# Altium PCB PCB1.PcbDoc
Units mm, origin at the board's own origin, x right, y up, seen from the top; angles counter-clockwise.
Board outline 40 x 30 mm, 4 copper layers (Top Layer, Internal Plane 1, Internal Plane 2, Bottom Layer), stack 1.537 mm thick; 84 components, 59 nets, 351 pads, 111 vias.
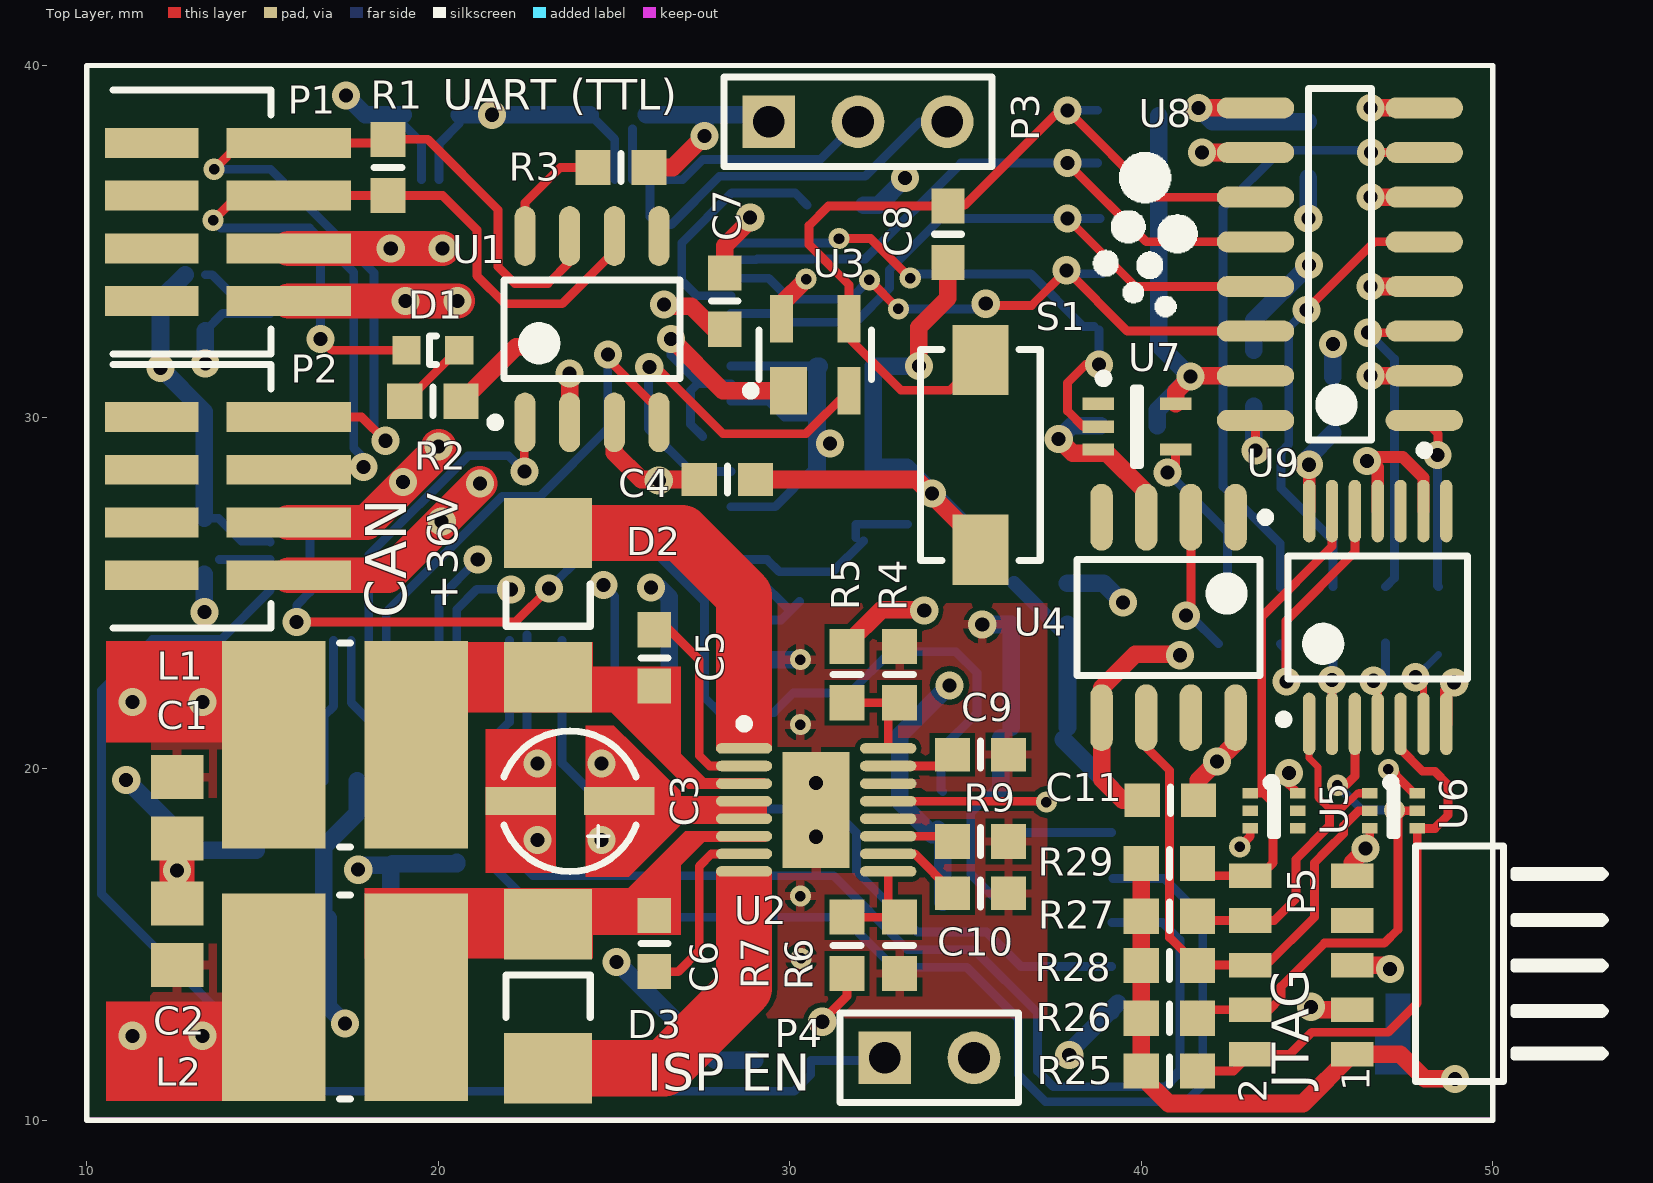
[diagram p0: Top Layer view]
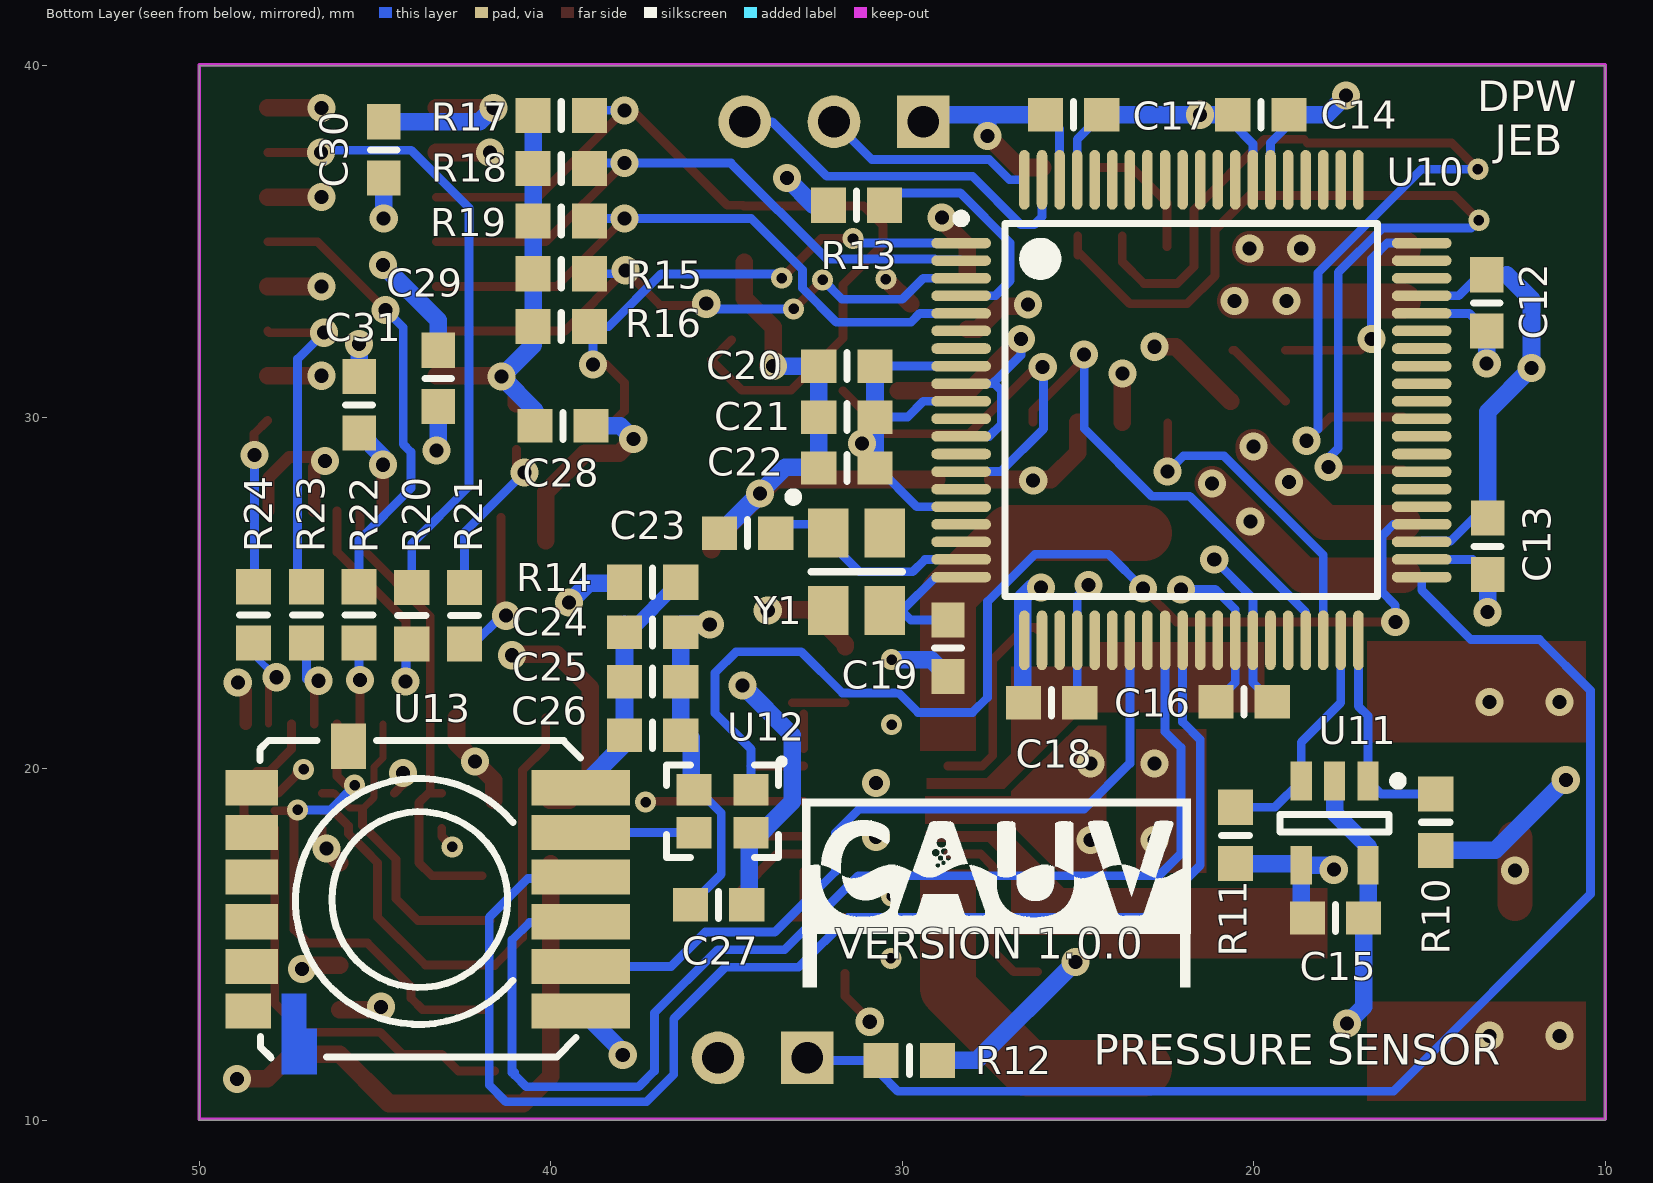
[diagram p1: Bottom Layer view, seen from below]
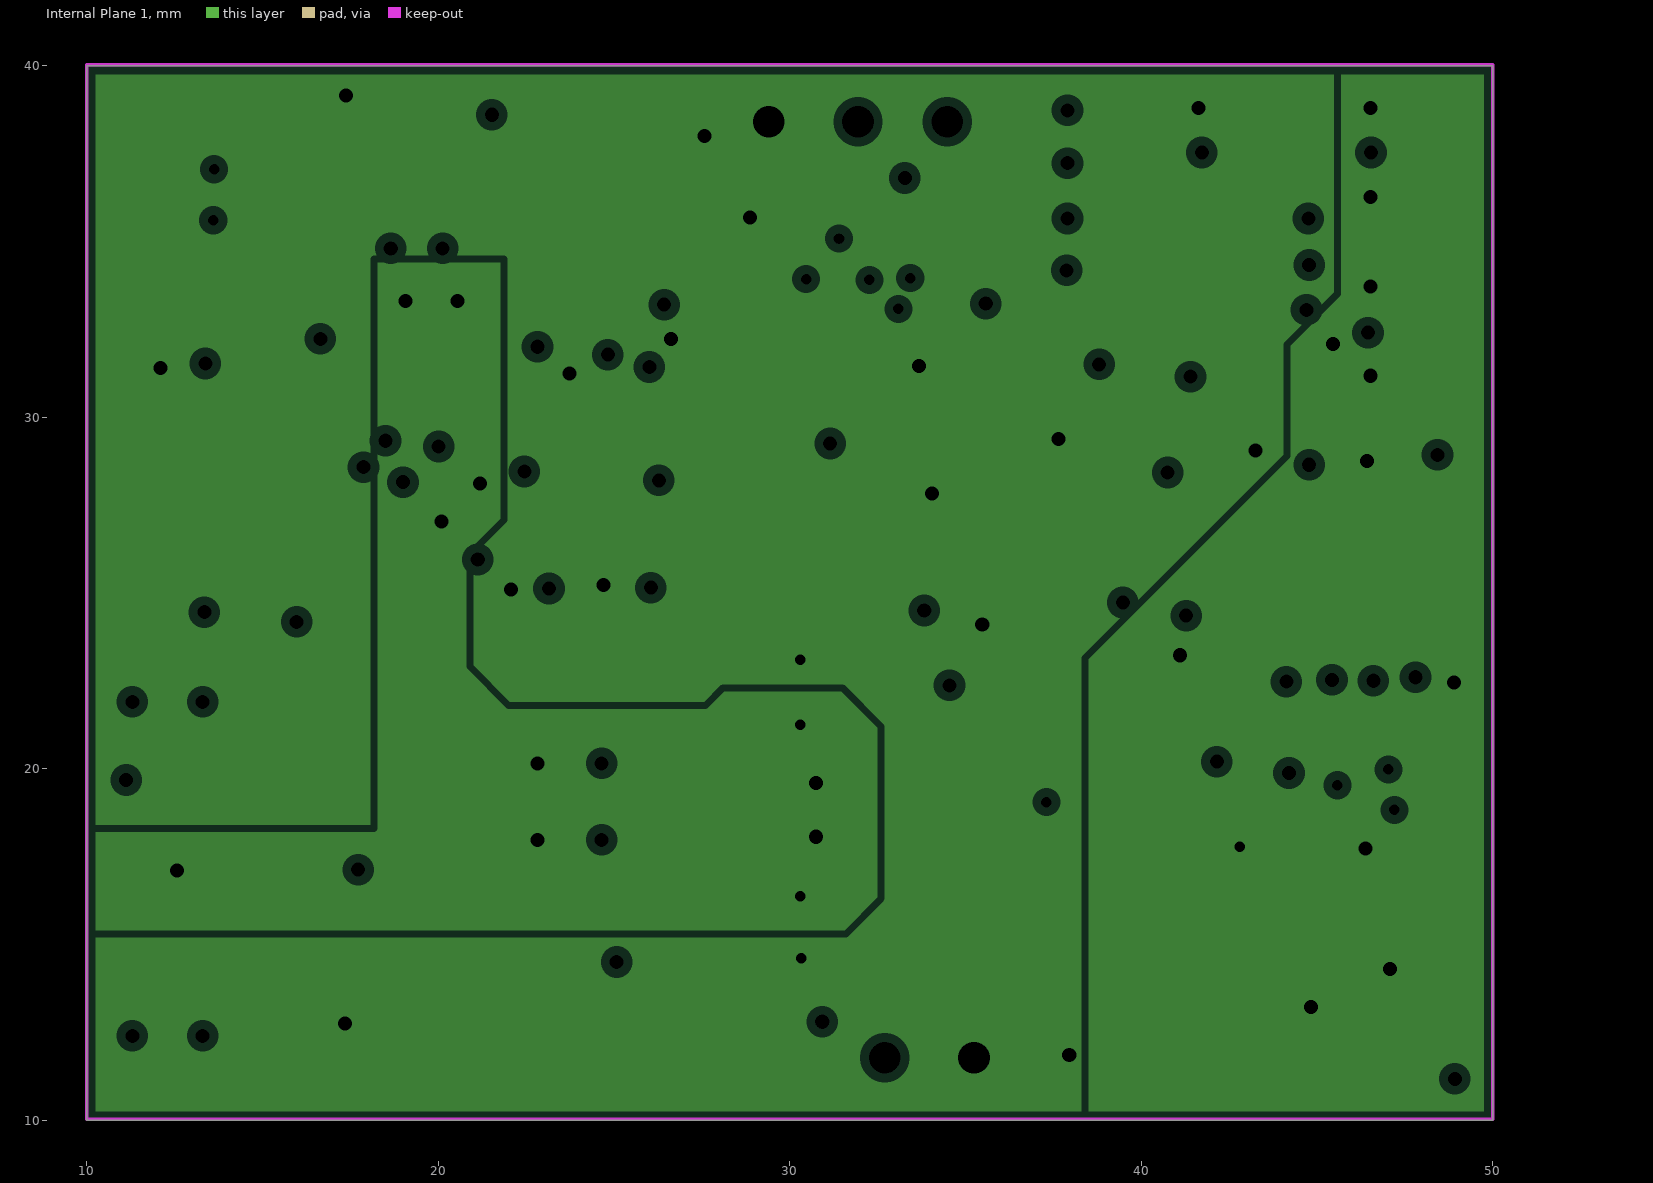
[diagram p2: Internal Plane 1, clearances drawn from the general rule]
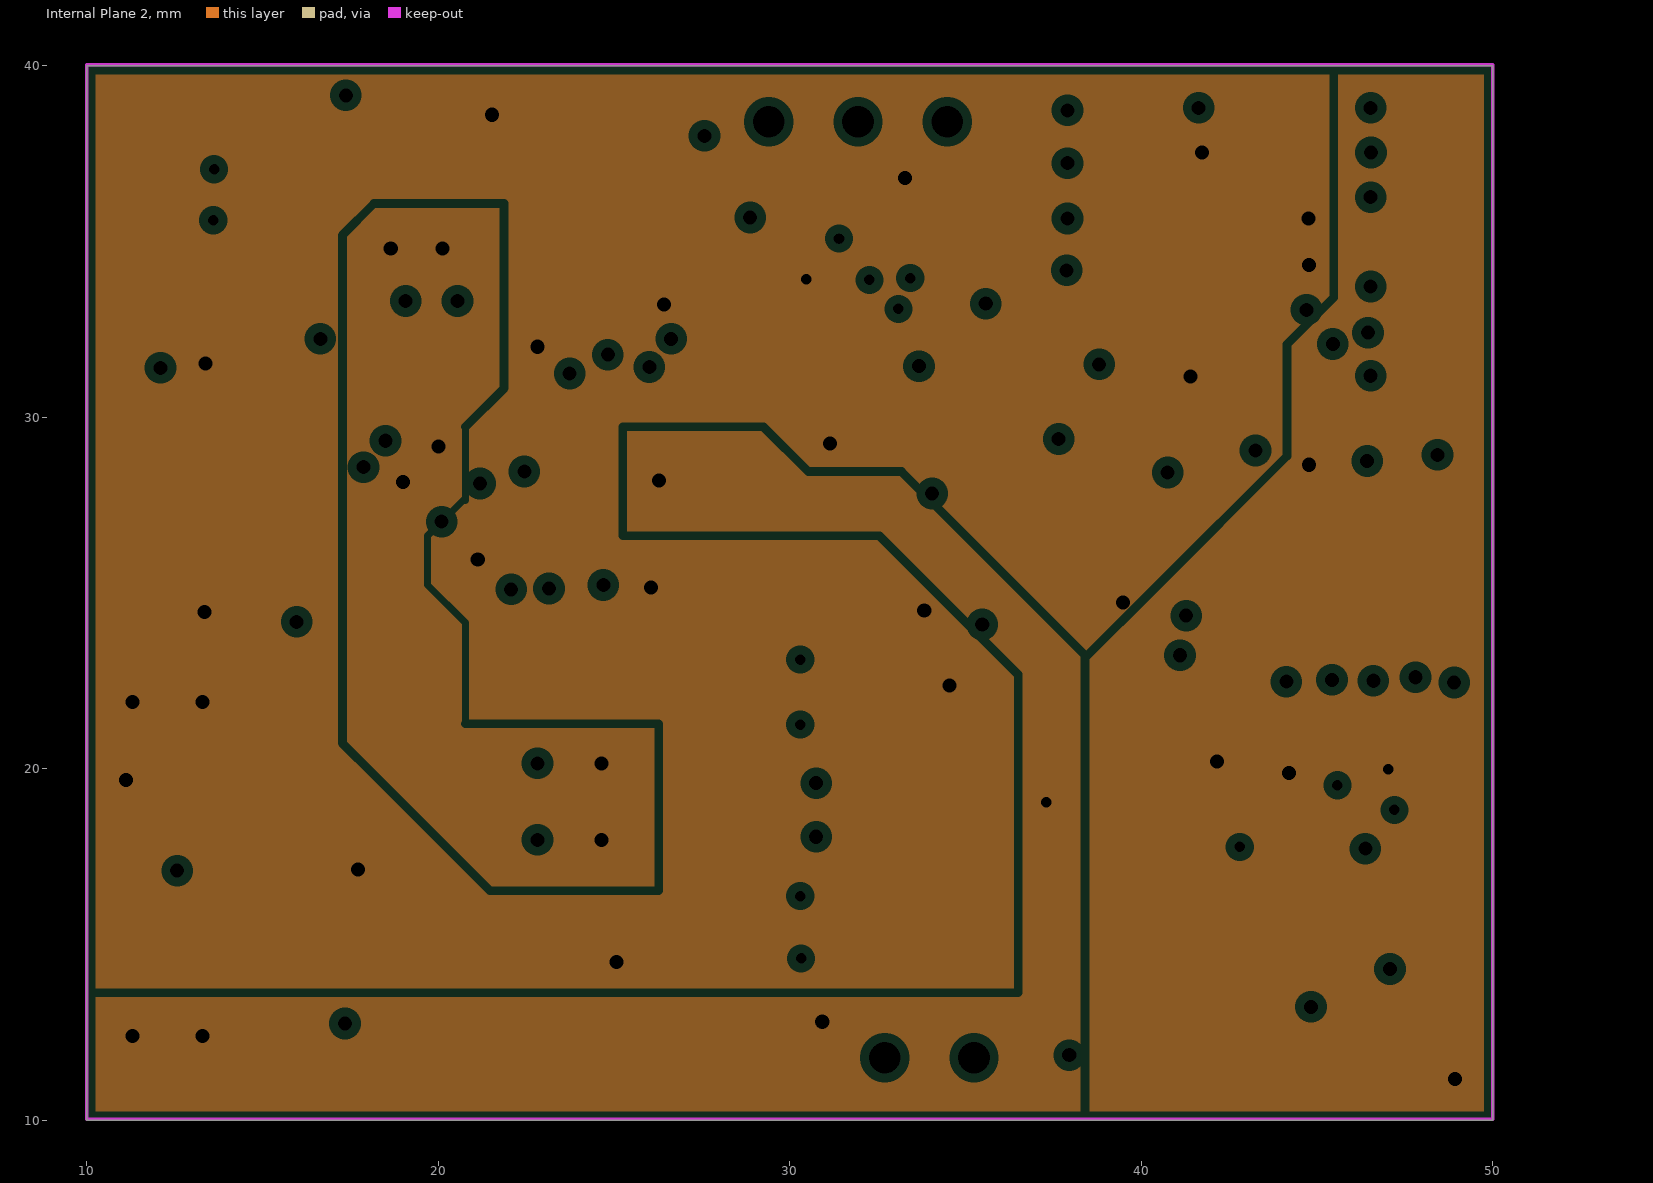
[diagram p3: Internal Plane 2, clearances drawn from the general rule]

## Layer stack, top to bottom
Top Layer: signal copper 0.018
Dielectric: core 0.22, FR-4, Dk 4.2
Internal Plane 1: plane copper 0.035, net (Multiple Nets)
Dielectric: prepreg 0.9906, FR-4, Dk 4.55
Internal Plane 2: plane copper 0.035, net (Multiple Nets)
Dielectric: core 0.22, FR-4, Dk 4.2
Bottom Layer: signal copper 0.018

## Board outline
10,10 10,40 50,40 50,10

## Design rules (kind name [scope] priority, off if disabled: settings)
Clearance [All] p1: gap=0.15
ComponentClearance [All] p1: gap=0.25 collisioncheckmode=3 verticalgap=0.25 showdistances=FALSE
HoleSize [All] p1: absolutevalues=TRUE maxlimit=10 minlimit=0.2 maxpercent=80.000 minpercent=20.000
HoleToHoleClearance [All] p1: gap=0.25 allowstackedmicrovias=TRUE
MinimumAnnularRing [All] p1: minimumring=0.15
MinimumSolderMaskSliver [All] p1: minsoldermaskwidth=0.125
PlaneClearance [All] p1: clearance=0.25
PlaneConnect [All] p1: planeconnectstyle=Relief reliefexpansion=0.5 reliefentries=4 reliefconductorwidth=0.25 reliefairgap=0.25
PolygonConnect [All] p1: connectstyle=Relief reliefconductorwidth=0.25 reliefentries=4 polygonreliefangle="90 Angle"
RoutingVias [All] p1: holewidth=0.3 width=0.6 viastyle="Through Hole" minholewidth=0.3 minwidth=0.6 maxholewidth=0.4 maxwidth=0.8
SilkToSilkClearance [All] p1: silktosilkclearance=0.25
SilkscreenOverComponentPads [All] p1: minsilkscreentomaskgap=0.125
SolderMaskExpansion [All] p1: expansion=0.125
Width "CAN Power" [InNet('CAN_POWER')] p1: maxlimit=10 minlimit=0.2 preferedwidth=2
Width Power [InNetClass('Power')] p2: maxlimit=10 minlimit=0.25 preferedwidth=0.5
Width General [All] p3: maxlimit=10 minlimit=0.2 preferedwidth=0.25
20 further rules are at their usual default settings.

## Classes and differential pairs
component class "U_CAN Termination Connector": P1 P2 R1
component class mcu: P3 U10
component class "U_I2C 3": R10 R11
component class "U_Dual 5V+3": C1 C2 C3 C5 C6 C9 C10 D2 D3 L1 L2 R4 R5 R6 R7 R9 U2
component class "U_1KB I2C EEPROM": C15 U11
component class "U_ARM JTAG Header - Optoisolated": C11 C28 C29 C30 C31 P5 R15 R16 R17 R18 R19 R20 R21 R22 R23 R24 R25 R26 R27 R28 R29 U4 U5 U6 U7 U8 U9
component class U_jtag: C12 C13 C14 C16 C17 C18 C19 C20 C21 C22 C23 P4 R12 R13 S1 Y1
component class U_led: D1 R2
component class U_pressure: C24 C25 C26 C27 C32 R14 U12 U13 U14
component class "U_Reset Supervisor": C7 C8 C33 C34 U3
component class "U_CAN Transciever": C4 R3 U1
net class Power: +3.3 +3.3_ISOL +5 CAN_POWER GND GND_ISOL

## Components (designator, comment, footprint, x,y, rotation, side; value= is the part's Value field where it differs from the comment)
C1 "Cap" C0805 12.575,18.875 r270 top (schematic designator C4)
C2 "Cap" C0805 12.575,15.3 r90 top (schematic designator C5)
C3 "Cap Pol1" EEEHC1H2R2R 22.35,19.075 r270 top (schematic designator C1)
C4 "Cap" C0603 28.225,28.225 r0 top (schematic designator C1)
C5 "Cap" C0603 26.15,23.15 r90 top (schematic designator C2)
C6 "Cap" C0603 26.15,15.025 r270 top (schematic designator C3)
C7 "Cap" C0603 28.15,33.3 r90 top (schematic designator C1)
C8 "Cap" C0603 34.5,35.2 r270 top (schematic designator C2)
C9 "Cap" C0603 35.425,20.4 r0 top (schematic designator C6)
C10 "Cap" C0603 35.425,16.45 r0 top (schematic designator C7)
C11 "Cap" C0603 40.825,19.1 r180 top (schematic designator C1)
C12 "Cap" C0603 13.375,33.25 r90 bottom (schematic designator C3)
C13 "Cap" C0603 13.35,26.325 r90 bottom (schematic designator C1)
C14 "Cap" C0603 19.8,38.6 r180 bottom (schematic designator C6)
C15 "Cap" C0603 17.675,15.75 r180 bottom (schematic designator C1)
C16 "Cap" C0603 20.275,21.9 r0 bottom (schematic designator C4)
C17 "Cap" C0603 25.125,38.6 r0 bottom (schematic designator C5)
C18 "Cap" C0603 25.75,21.875 r180 bottom (schematic designator C8)
C19 "Cap" C0603 28.7,23.425 r270 bottom (schematic designator C10)
C20 "Cap" C0603 31.575,31.45 r0 bottom (schematic designator C7)
C21 "Cap" C0603 31.575,30 r0 bottom (schematic designator C9)
C22 "Cap" C0603 31.575,28.55 r0 bottom (schematic designator C2)
C23 "Cap" C0603 34.4,26.7 r0 bottom (schematic designator C11)
C24 "Cap" C0603 37.1,23.875 r0 bottom (schematic designator C15)
C25 "Cap" C0603 37.1,22.475 r0 bottom (schematic designator C14)
C26 "Cap" C0603 37.1,20.95 r0 bottom (schematic designator C13)
C27 "Cap" C0603 35.225,16.125 r180 bottom (schematic designator C12)
C28 "Cap" C0603 39.65,29.75 r0 bottom (schematic designator C4)
C29 "Cap" C0603 43.2,31.1 r90 bottom (schematic designator C3)
C30 "Cap" C0603 44.75,37.6 r270 bottom (schematic designator C2)
C31 "Cap" C0603 45.45,30.35 r270 bottom (schematic designator C5)
D1 "" LGQ971 20.6,31.9 r180 top
D2 "D Schottky" VS-10BQ030TRPBF 23.125,24.65 r270 top (schematic designator D1)
D3 "D Schottky" VS-10BQ030TRPBF 23.125,13.525 r90 top (schematic designator D2)
L1 "Inductor" SDR0604-150YL 17.35,20.675 r0 top
L2 "Inductor" SDR0604-150YL 17.35,13.5 r180 top
P1 "Header 4" 87437-0443 15.75,33.3 r180 top (schematic designator P2)
P2 "Header 4" 87437-0443 15.75,25.5 r180 top (schematic designator P1)
P3 "Header 3" HDR1X3 29.4,38.4 r0 top (schematic designator P2)
P4 "Header 2" HDR1X2 32.7,11.775 r0 top (schematic designator P1)
P5 "Header 5X2H" FTSH-105-01-L-DH 53.4,17.6 r180 top (schematic designator P1)
R1 "Res2" R0603 18.575,37.1 r270 top
R2 "Res" R0603 19.85,30.45 r0 top (schematic designator R6)
R3 "Res" R0603 25.2,37.1 r180 top (schematic designator R1)
R4 "Res" R0603 33.125,22.675 r270 top (schematic designator R3)
R5 "Res" R0603 31.625,22.675 r90 top (schematic designator R1)
R6 "Res" R0603 33.125,14.975 r90 top (schematic designator R4)
R7 "Res" R0603 31.625,14.975 r270 top (schematic designator R2)
R9 "Res" R0603 35.425,17.925 r180 top (schematic designator R5)
R10 "Res" R0603 14.825,18.475 r270 bottom (schematic designator R2)
R11 "Res" R0603 20.525,18.1 r270 bottom (schematic designator R1)
R12 "Res" R0603 29.8,11.7 r180 bottom (schematic designator R1)
R13 "Res" R0603 31.3,36.025 r0 bottom (schematic designator R2)
R14 "Res" R0603 37.1,25.3 r0 bottom (schematic designator R3)
R15 "Res" R0603 39.7,34.075 r0 bottom (schematic designator R2)
R16 "Res" R0603 39.7,32.575 r0 bottom (schematic designator R5)
R17 "Res" R0603 39.7,38.575 r0 bottom (schematic designator R6)
R18 "Res" R0603 39.7,37.075 r180 bottom (schematic designator R4)
R19 "Res" R0603 39.7,35.575 r0 bottom (schematic designator R3)
R20 "Res" R0603 43.95,24.35 r270 bottom (schematic designator R10)
R21 "Res" R0603 42.45,24.35 r270 bottom (schematic designator R9)
R22 "Res" R0603 45.45,24.375 r270 bottom (schematic designator R8)
R23 "Res" R0603 46.95,24.375 r270 bottom (schematic designator R7)
R24 "Res" R0603 48.45,24.375 r270 bottom (schematic designator R1)
R25 "Res" R0603 40.8,11.4 r180 top (schematic designator R11)
R26 "Res" R0603 40.8,12.9 r180 top (schematic designator R12)
R27 "Res" R0603 40.8,15.8 r0 top (schematic designator R13)
R28 "Res" R0603 40.8,14.4 r180 top (schematic designator R14)
R29 "Res" R0603 40.8,17.3 r180 top (schematic designator R15)
S1 "SW-PB" DTSM-32S-B 35.425,28.925 r90 top
U1 "MCP2551" MCP2551 24.375,32.5 r90 top
U2 "LT3509" LT3509 30.75,18.825 r0 top (schematic designator U1)
U3 "STM811" STM811 30.725,31.775 r90 top (schematic designator U1)
U4 "HCPL-0601-500E" HCPL-0601-500 40.775,24.3 r270 top
U5 "TPD4E001DRLR" TPD4E001DRLR 43.1,19.3 r0 top (schematic designator U6)
U6 "TPD4E001DRLR" TPD4E001DRLR 46.5,19.3 r0 top (schematic designator U5)
U7 "SN74LVC1G14" SN74LVC1G14 39.875,29.725 r0 top (schematic designator U3)
U8 "ACSL-6400-00TE" ACSL-6400-00TE 45.65,34.35 r180 top (schematic designator U1)
U9 "74AC04MTC" 74AC04MTC 46.725,24.3 r90 top (schematic designator U2)
U10 "LPC1758" LPC1758FBD80 21.775,30.2 r180 bottom (schematic designator U1)
U11 "24AA08T-I/OT" 24AA08T-I/OT 17.7,18.45 r270 bottom (schematic designator U1)
U12 "LF SPXO009686" "LF SPXO009686" 34.3,19.4 r0 bottom (schematic designator U2)
U13 "MS5535" MS5535 48.5,14.375 r180 bottom (schematic designator U3)
Y1 "XTAL" C3E-24.000-12-3030-X 32.1,26.7 r270 bottom

## Footprints (in the part's own frame and the unit in brackets; to place one, negate y for a bottom-side part, rotate by r counter-clockwise, add the part's x,y. Pads: shape width x height; smd on the part's side, far side on the other; paste and mask are expansions set on the pad)
24AA08T-I/OT [mm] "MICROCHIP - 24AA08T-I/OT - EEPROM SERIAL 8KB, SMD, SOT-23-5"
  rect 1.1x0.6 smd mask+0.175: 1(-1.2,0.95) 2(-1.2,0) 3(-1.2,-0.95)
  rect 1.1x0.6 smd: 4(1.2,-0.95) 5(1.2,0.95)
  silkscreen extent -1.32,-1.55 0.25,1.92, body extent -0.87,-1.55 0.87,1.55, height 1.45
74AC04MTC [mm] "FAIRCHILD SEMICONDUCTOR - 74AC04MTC - IC, SM, LOGIC, 74AC, HEX INVERTER"
  oval 1.78x0.35 smd mask+0.15: 1(-3.027,1.95) 2(-3.027,1.3) 3(-3.027,0.65) 4(-3.027,0) 5(-3.027,-0.65) 6(-3.027,-1.3) 7(-3.027,-1.95) 8(3.027,-1.95) 9(3.027,-1.3) 10(3.027,-0.65) 11(3.027,0) 12(3.027,0.65) 13(3.027,1.3) 14(3.027,1.95)
  silkscreen extent -3.02,-2.55 1.75,2.8, body extent -2.25,-2.55 2.25,2.55, height 1.2
87437-0443 [mm] "MOLEX - 87437-0443 - HEADER, PICO-SPOX, 4WAY"
  rect 3.55x0.85 smd: 1(0,0) 2(0,-1.5) 3(0,-3) 4(0,-4.5)
  rect 2.65x0.85 smd: ""(3.9,-1.5) ""(3.9,0) ""(3.9,-4.5) ""(3.9,-3)
  silkscreen extent 0.5,-6 5,1.5, body extent -0.95,-5.9 5.05,1.4, height 5.77
ACSL-6400-00TE [mm] "AVAGO TECHNOLOGIES - ACSL-6400-00TE - OPTOCOUPLER, SMD, QUAD, HIGH SPEED"
  oval 2.2x0.6 smd: 1(-2.4,4.445) 2(-2.4,3.175) 3(-2.4,1.905) 4(-2.4,0.635) 5(-2.4,-0.635) 6(-2.4,-1.905) 7(-2.4,-3.175) 8(-2.4,-4.445) 9(2.4,-4.445) 10(2.4,-3.175) 11(2.4,-1.905) 12(2.4,-0.635) 13(2.4,0.635) 14(2.4,1.905) 15(2.4,3.175) 16(2.4,4.445)
  silkscreen extent -2.53,-5 0.9,5.42, body extent -1.99,-5 1.99,5, height 1.37
C3E-24.000-12-3030-X [mm]
  rect 1.4x1.15 smd: 1(0,0) 2(2.2,1.6) 3(2.2,0) 4(0,1.6)
  silkscreen extent -1.15,-1.13 1.1,2.1, body extent -0.6,-0.5 2.8,2.1, height 0.75
C0603 [mm] "Chip Capacitor, 2-Leads, Body 1.6x0.8mm, IPC Medium Density"
  rect 1x0.95 smd: 1(-0.8,0) 2(0.8,0)
  silkscreen extent 0,-0.38 0,0.38, body extent -0.88,-0.48 0.87,0.48, height 0.8
C0805 [mm] "KEMET - C0805C104K5RACTU - CAPACITOR, 0805, 100NF, 50V, X7R"
  rect 1.25x1.5 smd: 1(-0.889,0) 2(0.861,0)
  body extent -1.12,-0.72 1.09,0.72, height 1
DTSM-32S-B [mm] "MULTICOMP - DTSM-32S-B - TACTILE SWITCH, SPNO, SMD, 50MA"
  rect 2x1.6 smd: 1(-2.7,0) 2(2.7,0)
  silkscreen extent -3,-1.7 3,1.7, body extent -3.67,-1.75 3.67,1.75, height 2.08
EEEHC1H2R2R [mm] "PANASONIC - EEEHC1H2R2R - CAPACITOR, ELECTROLYTIC, 50V, 2.2UF"
  rect 0.8x2 smd: 1(0,2.8) 2(0,0)
  silkscreen extent -2,-0.48 2,3.28, body extent -2.15,-0.9 2.15,3.7, height 5.9
FTSH-105-01-L-DH [mm] "HEADER, 1.27MM, R/A, SMD, 10WAY"
  rect 1.2x0.7 smd: 1(7.4,5.725) 2(10.3,5.725) 3(7.4,4.456) 4(10.3,4.456) 5(7.4,3.187) 6(10.3,3.187) 7(7.4,1.919) 8(10.3,1.919) 9(7.4,0.65) 10(10.3,0.65)
  silkscreen extent 0.2,-0.2 5.6,6.5, body extent 0,0 10.77,6.35, height 3.43
HCPL-0601-500 [mm] "AVAGO TECHNOLOGIES - HCPL-0601-500E - OPTOCOUPLER, SMD, 10MBD"
  oval 1.9x0.64 smd: 1(-2.85,1.905) 2(-2.85,0.635) 3(-2.85,-0.635) 4(-2.85,-1.905) 5(2.85,-1.905) 6(2.85,-0.635) 7(2.85,0.635) 8(2.85,1.905)
  silkscreen extent -2.97,-2.6 1.65,2.88, body extent -2.03,-2.6 2.03,2.61, height 3.3
HDR1X2 [mm] "Connector; Header; 2 Position"
  rect 1.5x1.5 hole 0.9: 1(0,0)
  round 1.5 hole 0.9: 2(2.54,0)
  silkscreen extent -1.27,-1.27 3.81,1.27
HDR1X3 [mm] "Connector; Header; 3 Position"
  rect 1.5x1.5 hole 0.9: 1(0,0)
  round 1.5 hole 0.9: 2(2.54,0) 3(5.08,0)
  silkscreen extent -1.27,-1.27 6.35,1.27
"LF SPXO009686" [mm]
  rect 1x0.9 smd mask+0.165: 1(0,0) 2(1.625,0) 3(1.625,1.225) 4(0,1.225)
  silkscreen extent -0.94,-0.87 2.4,1.92, body extent -0.45,-0.4 2.07,1.63, height 0.95
LGQ971 [mm] "OSRAM - LGQ971 - LED, SMD, GREEN"
  rect 0.8x0.8 smd: 1(0,0) 2(1.5,0)
  silkscreen extent 0.65,-0.4 0.85,0.4, body extent 0.02,-0.4 1.42,0.4, height 0.9
LPC1758FBD80 [mm] "LPC1758FBD80"
  oval 1.7x0.3 smd: 1(-6.55,4.75) 2(-6.55,4.25) 3(-6.55,3.75) 4(-6.55,3.25) 5(-6.55,2.75) 6(-6.55,2.25) 7(-6.55,1.75) 8(-6.55,1.25) 9(-6.55,0.75) 10(-6.55,0.25) 11(-6.55,-0.25) 12(-6.55,-0.75) 13(-6.55,-1.25) 14(-6.55,-1.75) 15(-6.55,-2.25) 16(-6.55,-2.75) 17(-6.55,-3.25) 18(-6.55,-3.75) 19(-6.55,-4.25) 20(-6.55,-4.75) 41(6.55,-4.75) 42(6.55,-4.25) 43(6.55,-3.75) 44(6.55,-3.25) 45(6.55,-2.75) 46(6.55,-2.25) 47(6.55,-1.75) 48(6.55,-1.25) 49(6.55,-0.75) 50(6.55,-0.25) 51(6.55,0.25) 52(6.55,0.75) 53(6.55,1.25) 54(6.55,1.75) 55(6.55,2.25) 56(6.55,2.75) 57(6.55,3.25) 58(6.55,3.75) 59(6.55,4.25) 60(6.55,4.75)
  oval 0.3x1.7 smd: 21(-4.75,-6.55) 22(-4.25,-6.55) 23(-3.75,-6.55) 24(-3.25,-6.55) 25(-2.75,-6.55) 26(-2.25,-6.55) 27(-1.75,-6.55) 28(-1.25,-6.55) 29(-0.75,-6.55) 30(-0.25,-6.55) 31(0.25,-6.55) 32(0.75,-6.55) 33(1.25,-6.55) 34(1.75,-6.55) 35(2.25,-6.55) 36(2.75,-6.55) 37(3.25,-6.55) 38(3.75,-6.55) 39(4.25,-6.55) 40(4.75,-6.55) 61(4.75,6.55) 62(4.25,6.55) 63(3.75,6.55) 64(3.25,6.55) 65(2.75,6.55) 66(2.25,6.55) 67(1.75,6.55) 68(1.25,6.55) 69(0.75,6.55) 70(0.25,6.55) 71(-0.25,6.55) 72(-0.75,6.55) 73(-1.25,6.55) 74(-1.75,6.55) 75(-2.25,6.55) 76(-2.75,6.55) 77(-3.25,6.55) 78(-3.75,6.55) 79(-4.25,6.55) 80(-4.75,6.55)
  silkscreen extent -6.68,-5.3 5.3,5.57, body extent -6,-6 6,6, height 1.6
LT3509 [mm] "LT3509"
  oval 1.6x0.3 smd: 1(-2.05,1.75) 2(-2.05,1.25) 3(-2.05,0.75) 4(-2.05,0.25) 5(-2.05,-0.25) 6(-2.05,-0.75) 7(-2.05,-1.25) 8(-2.05,-1.75) 9(2.05,-1.75) 10(2.05,-1.25) 11(2.05,-0.75) 12(2.05,-0.25) 13(2.05,0.25) 14(2.05,0.75) 15(2.05,1.25) 16(2.05,1.75)
  rect 1.9x3.3 smd: 17(0,0)
  silkscreen extent -2.17,2.33 -1.92,2.57, body extent -1.55,-2.07 1.55,2.07, height 1.1
MCP2551 [mm]
  oval 1.7x0.6 smd: 1(-2.65,1.905) 2(-2.65,0.635) 3(-2.65,-0.635) 4(-2.65,-1.905) 5(2.65,-1.905) 6(2.65,-0.635) 7(2.65,0.635) 8(2.65,1.905)
  silkscreen extent -2.77,-2.5 1.4,2.88, body extent -1.99,-2.5 1.99,2.5, height 1.75
MS5535 [mm] "Pressure Sensor"
  rect 2.8x1 smd mask+0.135: 1(9.35,-1.27) 2(9.35,0) 3(9.35,1.27) 4(9.35,2.54) 5(9.35,3.81) 6(9.35,5.08)
  rect 1.3x1 smd mask+0.135: ""(-0.1,-1.27)
  rect 1.5x1 smd mask+0.135: ""(0,0) ""(0,1.27) ""(0,2.54) ""(0,3.81) ""(0,5.08)
  rect 1x1.3 smd mask+0.135: ""(2.75,6.26)
  Top Layer region: 1.85,-3.075 1.85,-1.775 1.55,-1.775 1.55,-0.775 0.85,-0.775 0.85,-3.075
  silkscreen extent 0.23,-2.6 9.35,6.43, body extent 0.25,-2.58 9.25,6.42, height 4.48
R0603 [mm]
  rect 1x1 smd: 1(-0.8,0) 2(0.8,0)
  silkscreen extent 0,-0.4 0,0.4, body extent -0.85,-0.48 0.85,0.47, height 0.45
SDR0604-150YL [mm] "BOURNS - SDR0604-150YL - INDUCTOR, SMD, 15UH, 1.6A"
  rect 2.95x5.9 smd: 1(-2.025,0) 2(2.025,0)
  silkscreen extent -0.15,-2.9 0.15,2.9, body extent -2.9,-2.88 2.9,2.92, height 4.8
SN74LVC1G14 [mm] "TEXAS INSTRUMENTS - SN74LVC1G14DCKR - INVERTER, SINGLE, SCHMITT-TRIG, 5SC70"
  rect 0.9x0.35 smd mask+0.15: 1(-1.1,0.65) 2(-1.1,0) 3(-1.1,-0.65)
  rect 0.9x0.35 smd: 4(1.1,-0.65) 5(1.1,0.65)
  silkscreen extent -1.07,-1.1 0.1,1.5, body extent -0.7,-1.07 0.7,1.08, height 1.1
STM811 [mm] "SOT143, 4-Leads, Body 3.0x2.6mm (max), Pitch 1.92mm, IPC Medium Density"
  rect 1.35x1.05 smd: 1(-1.025,0.76)
  rect 1.35x0.65 smd: 2(-1.025,-0.96) 3(1.025,-0.96) 4(1.025,0.96)
  silkscreen extent -1.15,-1.6 0.7,1.96, body extent -0.7,-1.52 0.7,1.52, height 1.12
TPD4E001DRLR [mm] "TEXAS INSTRUMENTS - TPD4E001DRLR - DIODE, TVS"
  rect 0.45x0.3 smd: 1(0,0) 2(0,-0.5) 3(0,-1) 4(1.35,-1) 5(1.35,-0.5) 6(1.35,0)
  silkscreen extent 0.48,-1.2 0.77,0.42, body extent 0.1,-1.2 1.25,0.23, height 0.6
VS-10BQ030TRPBF [mm] "VISHAY FORMERLY I.R. - VS-10BQ030TRPBF - DIODE, SCHOTTKY, 1A, 30V"
  rect 2x2.5 smd: 1(-2.05,0) 2(2.05,0)
  silkscreen extent -0.6,-1.2 0.6,1.2, body extent -2.2,-1.8 2.2,1.8, height 2.4

## Part data
C1 C2 C4 C5 C6 C7 C8 C9 C10 C11 C12 C13 C14 C15 C16 C17 C18 C19 C20 C21 C22 C23 C24 C25 C26 C27 C28 C29 C30 C31: "Capacitor"
C3: "Polarized Capacitor (Radial)"
D1: library part LED2, "Typical RED, GREEN, YELLOW, AMBER GaAs LED"
D2 D3: "Schottky Diode"
P1 P2: "Header, 4-Pin"
P3: "Header, 3-Pin"
P4: "Header, 2-Pin"
P5: "Header, 5-Pin, Dual row, Right Angle"
R1: "Resistor"
R2 R3 R4 R5 R6 R7 R9 R10 R11 R12 R13 R14 R15 R16 R17 R18 R19 R20 R21 R22 R23 R24 R25 R26 R27 R28 R29: library part Res2, "Resistor"
S1: "Switch"
U1: "High-speed CAN Transceiver, 1Mb/s"
U3: "STMICROELECTRONICS - STM811TW16F - MPU LOW RESET 3.08V, SOT-143-4, 811"
U4: "AVAGO TECHNOLOGIES - HCPL-0601-500E - OPTOCOUPLER, SMD, 10MBD"
U5 U6: "TEXAS INSTRUMENTS - TPD4E001DRLR - DIODE, TVS"
U7: "TEXAS INSTRUMENTS - SN74LVC1G14DCKR - INVERTER, SINGLE, SCHMITT-TRIG, 5SC70"
U8: "AVAGO TECHNOLOGIES - ACSL-6400-00TE - OPTOCOUPLER, SMD, QUAD, HIGH SPEED"
U9: "FAIRCHILD SEMICONDUCTOR - 74AC04MTC - IC, SM, LOGIC, 74AC, HEX INVERTER"
U10: "NXP - LPC1758FBD80 - MCU, 32BIT, ARM CORTEX M3, 80LQFP"
U11: "MICROCHIP - 24AA08T-I/OT - EEPROM SERIAL 8KB, SMD, SOT-23-5"
U12: "IQD FREQUENCY PRODUCTS - LF SPXO009686 - OSC, CFPS-109, 32.768K, SMD 2.6 X 2.1, 3"
U13: "SENSOR PRESURE 14 BAR 16BIT"
Y1: "Crystal Oscillator"

## Via types
v1: diameter 0.8, hole 0.4, Top Layer to Bottom Layer, tented both sides, 95 vias
v2: diameter 0.6, hole 0.3, Top Layer to Bottom Layer, tented both sides, 16 vias

## Nets (pads, with @x,y where several pads share a name; then routed paths per layer and width w, separated by ;. In a path a pad name is that pad's centre, name@x,y a point inside that pad or via, vN(x,y) a via of type N, cw(c..) or ccw(c..) an arc to the next point about the centre after c; other vN are vias at no path point)
+3.3: C1.1 C7.1 C12.1 C13.1 C14.1 C15.1 C16.1 C17.1 C18.1 C20.1 C21.1 C22.1 C27.2 C28.2 C29.2 C30.2 L1.1 R2.2 R5.2 R10.2 R11.2 R12.2 R13.2 R14.2 R15.2 R16.2 R17.2 R18.1 R19.2 U3.4 U7.5 U8.10 U8.15 U10.8 U10.10 U10.16 U10.21 U10.34 U10.42 U10.56 U10.67 U10.77 U11.4 U12.4 | length 84.4
  Top Layer w0.5: R2.2 20.675,30.45 22.225,32 v1(22.825,32) ; v1(26.425,33.2) 26.425,33.175 26.45,33.15 27.2,33.15 27.85,32.5 C7.1 ; U3.4@29.765,33.223 v2(30.467,33.925) ; R5.2 31.625,23.541 32.609,24.525 v1@33.641,24.525 ; U7.5 40.975,30.725 v1(41.4,31.15) ; v1@41.4,31.175 U8.15 ; v1(41.723,37.525) U8.10
  Bottom Layer w0.25: C12.1 13.875,32.95 U10.56 ; C13.1@13.775,25.95 U10.42 ; C16.1 20.025,22.45 U10.34 ; 20.025,24.55 U10.34 ; U10.67 20.025,37.775 C14.1@20.6,38.35 ; v1(21.125,25.95) 20.025,24.85 U10.34 ; C17.1 25.025,37.9 U10.77 ; U10.16 29.586,27.45 C22.1@30.686,28.55 ; U10.10 29.4,30.45 29.85,30 C21.1 ; U10.8 C20.1
  Bottom Layer w0.5: v1(11.125,19.675) 11.125,19.65 11.156,19.65 13.131,17.675 R10.2 ; v1(13.35,24.45) C13.1 ; v1(13.375,31.523) C12.1 ; v1@17.85,17.25 U11.4 18.65,15.925 C15.1 ; U11.4@18.7,17.3 R11.2 R11.2@20.525,17.334 ; C14.1 v1(21.527,38.6) C17.1 ; v1(25.075,14.5) 27.875,11.7 R12.2 ; v1(26.05,25.15) 26.302,25.15 26.575,24.877 26.575,21.9 C18.1 ; C22.1 C21.1 C20.1 C20.1@30.834,31.45 ; R13.2 32.525,36.025 33.275,36.775 v1(33.275,36.8) ; U12.4@34.059,18.125 33.684,18.5 33.125,19.059 33.125,20.95 v1(34.545,22.37) ; U12.4@34.205,18.27 34.35,18.125 C27.2@34.35,16.2 ; R14.2@37.9,25.275 38.925,25.275 v1(39.475,24.725) ; C28.2 40.45,30.2 v1(41.4,31.15) 40.5,32.05 40.5,32.398 R16.2 R19.2 R17.2 ; C29.2 43.2,32.75 v1(44.775,34.325) ; v1(44.75,35.65) C30.2
  other v1: 17.725,17.125 11.3,21.9 13.3,21.9 33.825,24.5 31.15,29.25
+3.3_ISOL: C11.1 C31.2 P5.1 R25.2 R26.2 R27.1 R28.2 R29.2 U4.8 U5.6 U6.6 U9.14 | length 23.3
  Top Layer w0.25: v1(44.2,19.875) 44.2,19.55 U5.6 ; v2(47.027,19.976) v2(47.027,19.976) 47.05,20 47.103,20 47.227,19.876 47.227,19.823 47.75,19.3 U6.6
  Top Layer w0.35: U9.14 v1(44.775,28.644)
  Top Layer w0.5: R29.2 R28.2 R26.2 R25.2 40,11.25 40.775,10.475 44.6,10.475 P5.1 47.366,11.875 48.065,11.176 v1(48.92,11.176) ; C11.1 41.625,19.675 v1(42.15,20.2) 42.68,20.73 U4.8
  Bottom Layer w0.5: v1(44.775,28.644) 44.775,28.875 C31.2
+5: C2.1 C4.1 L2.2 R7.2 U1.3 U2.13 | length 9.6
  Top Layer w0.25: v1@31,12.9 31.625,13.525 R7.2 ; U2.13 v2@37.3,19.075
  Top Layer w0.5: U1.3 25.01,28.99 25.775,28.225 26.498,28.225 C4.1
  other v1: 11.3,12.4 13.3,12.4 30.925,12.8 26.275,28.2
  other v2: 37.3,19.05
B\R\D\_\R\E\S\E\T\: C8.1 R17.1 S1.2 U3.3 U8.11 | length 25.1
  Top Layer w0.25: C8.1 31.1,36 30.55,35.45 30.55,34.9 31.685,33.765 U3.3 31.685,32.24 33.163,30.762 34.562,30.762 S1.2 S1.2@34.85,32.2 ; C8.1@34.525,36.025 34.975,36.025 37.675,38.725 v1(37.9,38.725) 40.37,36.255 U8.11
  Bottom Layer w0.25: v1(37.9,38.725) R17.1@38.75,38.725
CAN.CAN_N: P1.3 P2.3 R1.2 U1.6 | length 26.9
  Top Layer w0.25: v2(13.6,35.6) 14.3,36.3 P1.3 R1.2 20.125,36.3 21.1,35.325 21.1,34.025 21.9,33.225 23.525,33.225 U1.6@25.01,34.71 ; P2.3 17.849,28.5 17.875,28.526 v1(17.875,28.575) ; U1.6@25.01,34.61 U1.6@25.01,34.71 ; U1.6 U1.6@25.01,34.71
  Bottom Layer w0.25: 13.825,35.375 16.341,35.375 17.601,34.115 17.601,29.113 v1@18.007,28.707
CAN.CAN_P: P1.4 P2.4 R1.1 U1.7 | length 27.2
  Top Layer w0.25: v2(13.625,37.05) 14.375,37.8 P1.4 R1.1@18.475,37.8 ; P2.4 17.827,30 v1(18.501,29.326) ; R1.1 19.7,37.9 21.7,35.9 21.7,34.275 22.175,33.8 23.125,33.8 23.74,34.415 U1.7
  Bottom Layer w0.25: v2(13.625,37.05) 15.231,37.05 18.176,34.105 18.176,29.651
CAN.RXD: U1.4 U10.37 | length 13.8
  Top Layer w0.25: v1@24.825,31.65 26.28,30.195 U1.4
  Bottom Layer w0.25: U10.37 18.525,24.451 21.824,27.75 22.9,27.75 24.825,29.675 v1(24.825,31.775)
CAN.TXD: U1.1 U10.38 | length 9.6
  Top Layer w0.25: v1(22.45,28.45) U1.1@22.45,29.83
  Bottom Layer w0.25: U10.38 18.025,26.075 20.85,28.9 22,28.9 v1(22.45,28.45)
CAN_POWER: C3.1 P1.2 P2.2 U2.4 U2.5 | length 9.6
  Top Layer w1: P2.2 17.959,27 20.014,29.054 v1(20.014,29.164) ; P1.2 18.35,34.8 v1(20.125,34.8)
  other v1: 24.65,17.975 24.65,20.15 19,28.15 18.65,34.8
GND: C1.2 C2.2 C3.2 C4.2 C7.2 C8.2 C9.2 C10.2 C12.2 C13.2 C14.2 C15.2 C16.2 C17.2 C18.2 C19.2 C20.2 C21.2 C22.2 C23.2 C24.1 C25.1 C26.1 C27.1 C28.1 C29.1 C30.1 P1.1 P2.1 P3.1 P4.2 R3.1 R4.1 R6.1 R9.1 S1.1 U1.2 U2.12 U2.14 U2.17 U3.1 U4.3 U7.3 U8.9 U8.16 U10.9 U10.12 U10.24 U10.33 U10.43 U10.57 U10.66 U10.78 U11.2 U11.5 U12.2 U13.1 | length 110.2
  Top Layer w0.25: v1(43.25,29.05) U8.16
  Top Layer w0.5: U1.2 v1(23.74,31.24) ; R3.1 26.675,37.1 v1(27.575,38) ; v1(26.625,32.225) 28.1,30.75 U3.1 U3.1@30.119,30.75 ; C7.2 28.15,34.875 28.875,35.6 v1(28.875,35.675) ; C4.2 33.6,28.225 34.1,27.725 35.425,26.4 S1.1 ; v1(33.675,31.45) 33.675,32.55 34.5,33.375 C8.2 ; v1(37.65,29.375) 38.05,28.975 39.025,28.975 40.14,27.86 U4.3 U4.3@40.14,26.49 ; v1(41.63,38.795) U8.9
  Top Layer w1: C2.2 v1(12.575,17.1) C1.2 ; P2.1 18.575,25.5 v1(21.188,28.113) ; P1.1 19.225,33.3 v1(20.55,33.3)
  Bottom Layer w0.25: C13.2 13.749,27.125 14.399,26.475 15.2,26.475 U10.43 ; C12.2 13.575,34.05 14.175,33.45 U10.57 ; C15.2@16.75,15.875 C15.2 ; C14.2@19,38.325 19.525,37.8 U10.66 ; C16.2 20.525,22.45 U10.33 20.525,24.525 21.1,25.1 v1(22.075,25.1) ; v1(24.7,25.225) 25.025,24.9 U10.24 25.025,21.95 C18.2 ; U10.78 C17.2@25.525,38.2 ; v1(26.625,32.225) 26.625,31.759 27.375,31.009 27.375,30.95 ; U10.12@27.524,29.45 27.175,29.799 27.175,30.75 27.375,30.95 ; U10.9 27.375,30.95 ; U12.2 35.811,19.4 35.15,18.739 35.15,17 C27.1 ; v1@43.2,29.1 v1(43.25,29.05)
  Bottom Layer w0.5: 12.8,34.05 12.1,33.35 v1(12.1,31.4) 13.35,30.15 C13.2 ; C15.2@16.75,15.875 U11.5 16.75,17.775 17.7,18.725 U11.2 ; C15.2 16.875,13.225 v1(17.35,12.75) ; v1(17.375,39.15) 17.925,38.6 C14.2 ; C17.2 27.575,38.6 ; v1(27.575,38) 27.575,38.6 ; C19.2 29.175,23.1 v2(30.3,23.1) ; P3.1@29.4,38.6 27.575,38.6 ; C22.2 C22.2@32.375,28.575 ; v1(33.675,31.45) C20.2 C21.2 C22.2@32.375,28.575 ; v1(34.05,27.825) 34.05,27.775 34.25,27.575 34.266,27.575 35.2,26.641 C23.2@35.2,26.6 ; C23.2@35.025,26.875 33.325,28.575 C22.2@32.375,28.575 ; v1(35.475,24.1) 36.3,24.1 36.3,22.7 36.3,21.175 36.3,21.6 ; U12.2@35.975,19.35 36,19.375 C26.1@36,20.875 ; v1(37.65,29.375) 38.025,29.75 C28.1 ; v1(37.95,11.85) 37.95,11.95 U13.1@39.33,13.33 ; U13.1@38.855,13.105 U13.1 ; v1(41.63,38.795) 42.025,38.4 C30.1 ; v1@43.2,29.1 C29.1
  other v1: 22.825,17.975 30.75,18.063 30.75,19.587 22.825,20.15 20.1,27.025 19.075,33.3
  other v2: 30.325,14.6 30.3,16.375 30.3,21.25
GND_ISOL: C11.2 C31.1 P5.3 P5.5 P5.9 U4.5 U5.3 U6.3 U8.2 U8.4 U8.6 U8.8 U9.7 U9.9 U9.11 | length 23.5
  Top Layer w0.25: v2(42.8,17.775) 43.1,18.075 U5.3 ; v1@46.5,17.825 U6.3
  Top Layer w0.35: U9.11 46.725,28.575 46.488,28.813 46.537,28.863 47.437,28.863 48.025,28.275 U9.9 ; U9.7 48.675,22.225 v1(48.9,22.45)
  Top Layer w0.5: C11.2 39.475,19.1 38.87,19.705 U4.5 38.87,22.295 39.825,23.25 v1@41.1,23.25 ; v1(44.825,13.225) 44.906,13.144 P5.3 ; P5.5 47.027,14.413 47.075,14.365 v1(47.075,14.3) ; 46,17.325 v1@46.5,17.825 ; v1(46.523,31.175) U8.2 ; v1(46.523,33.715) U8.4 ; v1(46.523,36.255) U8.6 ; v1(46.523,38.795) U8.8
  Bottom Layer w0.5: C31.1 v1(45.45,32.077)
  other v1: 46.375,17.725 41.1,23.225 46.425,28.75
I2C.SCL: R10.1 U10.40 U11.1 | length 6.2
  Bottom Layer w0.25: R10.1 16.375,19.275 U11.1 16.75,21.5 17.025,21.775 U10.40
I2C.SDA: R11.1 U10.39 U11.3 | length 6.7
  Bottom Layer w0.25: U10.39 17.525,21.875 18.65,20.75 U11.3 19.4,18.9 R11.1
I\S\P\_\E\N\: P4.1 R12.1 U10.41 | length 37.3
  Bottom Layer w0.25: U10.41 15.225,25.075 13.825,23.675 11.875,23.675 10.425,22.225 10.425,16.425 16.025,10.825 26.4,10.825 30.125,10.825 30.6,11.3 R12.1 P4.1@32.625,11.7
JTAG.TCK: R19.1 U8.13 U10.5 | length 18.3
  Top Layer w0.25: v1(37.9,35.65) 39.835,33.715 U8.13
  Bottom Layer w0.25: U10.5 29.5,32.95 29.75,32.7 31.875,32.7 32.839,33.664 32.839,34.189 34.3,35.65 v1(37.9,35.65) R19.1@38.825,35.65
JTAG.TDI: R18.2 U8.12 U10.2 | length 17.8
  Top Layer w0.25: v1(37.9,37.225) 40.14,34.985 U8.12
  Bottom Layer w0.25: U10.2@28.352,34.477 29.05,34.477 29.073,34.5 30.705,34.5 32.15,34.5 34.875,37.225 v1(37.9,37.225) R18.2@38.75,37.225
JTAG.TDO: R16.1 U7.2 U10.1 | length 15.6
  Top Layer w0.25: v2@31.478,35 v2(31.402,35.077) 32.302,35.077 v2(33.427,33.952) ; U7.2 38.35,29.725 37.9,30.175 37.9,30.975 38.425,31.5 v1(38.8,31.5)
  Bottom Layer w0.25: U10.1 31.275,34.95 v2(31.402,35.077) ; v2@33.4,33.925 v2(33.427,33.952) 33.548,34.073 36.852,34.073 38.35,32.575 R16.1@38.662,32.575 ; v1(38.8,31.5) R16.1@38.8,32.475
JTAG.TMS: R15.1 U8.14 U10.3 | length 17.9
  Top Layer w0.25: v2(32.264,33.902) v2(33.091,33.075) ; v1(35.575,33.225) 35.525,33.175 36.875,33.175 v1(37.875,34.175) 39.605,32.445 U8.14
  Bottom Layer w0.25: U10.3 29.4,33.95 30,33.35 31.712,33.35 v2(32.264,33.902) ; v2(33.091,33.075) v1@35.425,33.075 ; v1(37.875,34.175) 37.975,34.075 R15.1
NetC5_1: C5.1 D2.2 L1.2 U2.3
NetC5_2: C5.2 U2.2 | length 5.8
  Top Layer w0.25: C5.2 26.15,24.011 26.514,24.011 27.425,23.1 27.425,20.375 27.725,20.075 U2.2
NetC6_1: C6.1 D3.2 L2.1 U2.6
NetC6_2: C6.2 U2.7 | length 5.3
  Top Layer w0.25: C6.2 26.825,14.225 27.425,14.825 27.425,17.225 27.775,17.575 U2.7
NetC9_1: C9.1 U2.15 | length 1.5
  Top Layer w0.25: U2.15 C9.1@34.3,20.075
NetC10_1: C10.1 U2.10 | length 2.3
  Top Layer w0.25: U2.10 33.551,17.575 34.625,16.501 C10.1
NetC19_1: C19.1 U10.20 Y1.2 | length 3.9
  Bottom Layer w0.25: U10.20 29.05,25.45 Y1.2@30,24.5 ; C19.1 29.75,24.225 Y1.2@30.275,24.75
NetC23_1: C23.1 U10.19 Y1.1 | length 6.1
  Bottom Layer w0.25: U10.19 29.35,25.95 29.7,25.6 31.225,25.6 Y1.1@32.1,26.475 ; Y1.1@31.875,26.575 31.875,26.95 C23.1@33.35,26.95
NetC24_2: C24.2 C25.2 C26.2 R14.1 U13.6 | length 7
  Bottom Layer w0.25: C24.2@37.775,24.1 C24.2@37.9,24.1
  Bottom Layer w0.4: R14.1@36.375,25.275 C24.2@37.775,23.875
  Bottom Layer w0.5: C26.2@37.778,20.828 U13.6 ; C26.2@37.9,21.175 37.9,22.7 C24.2@37.9,24.1
NetD1_1: D1.1 R2.1 | length 2.1
  Top Layer w0.25: R2.1@19.1,30.45 20.55,31.9 D1.1
NetD2_1: D2.1 U2.1 | length 9.7
  Top Layer w1.6: D2.1 26.925,26.7 28.7,24.925 28.7,21.575
NetD3_1: D3.1 U2.8 | length 8.9
  Top Layer w1.6: D3.1 26.425,11.475 28.7,13.75 28.7,14.551 28.7,16.1
NetR4_2: R4.2 R5.1 U2.16 | length 2.5
  Top Layer w0.25: R5.1 R4.2 ; U2.16 R4.2@32.8,21.55
NetR6_2: R6.2 R7.1 U2.9 | length 2.5
  Top Layer w0.25: R7.1 R6.2 ; R6.2@32.8,16.1 U2.9
NetR9_2: R9.2 U2.11 | length 1.7
  Top Layer w0.25: U2.11 R9.2@34.475,18.075
NetR13_1: R13.1 U10.4 | length 7
  Bottom Layer w0.25: U10.4 27.35,33.45 26.925,33.875 26.925,34.95 28.352,36.377 30.148,36.377 R13.1
NetR20_1: R20.1 U8.7 | length 17.9
  Top Layer w0.25: v1(46.533,37.525) U8.7
  Bottom Layer w0.25: R20.1 43.95,26.4 42.325,28.025 42.325,35.95 43.967,37.592 46.466,37.592 v1(46.533,37.525)
NetR20_2: R20.2 U9.12 | length 7
  Top Layer w0.25: v1(44.125,22.475) 44.125,22.439 44.12,22.439 44.12,24.207 46.075,26.162 U9.12
  Bottom Layer w0.25: R20.2 44.12,23.38 44.12,22.439 44.125,22.439 v1(44.125,22.475)
NetR21_1: R21.1 U7.4 | length 4.7
  Top Layer w0.25: v1(40.75,28.425) 40.975,28.65 U7.4
  Bottom Layer w0.25: v1(40.75,28.425) 42.45,26.725 R21.1
NetR21_2: R21.2 U4.2 | length 3.9
  Top Layer w0.25: v1@41.41,24.335 U4.2
  Bottom Layer w0.25: v1@41.41,24.335 R21.2@42.195,23.55
  other v1: 41.275,24.35
NetR22_1: R22.1 U8.5 | length 12.9
  Top Layer w0.25: v1(44.7,33.05) 46.634,34.985 U8.5
  Bottom Layer w0.25: v1(44.7,33.05) 44.196,32.547 44.196,29.225 43.975,29.004 43.975,27.975 45.45,26.5 R22.1
NetR22_2: R22.2 U9.2 | length 2.3
  Top Layer w0.25: U9.2 v1(45.425,22.525)
  Bottom Layer w0.25: v1@45.386,22.564 v1(45.425,22.525) ; v1@45.45,22.55 R22.2
NetR23_1: R23.1 U8.3 | length 9.3
  Top Layer w0.25: v1(46.45,32.4) 48.005,32.4 U8.3
  Bottom Layer w0.25: v1(46.45,32.4) 47.198,31.652 47.198,25.423 R23.1
NetR23_2: R23.2 U9.4 | length 2.3
  Top Layer w0.25: v1(46.6,22.5) 46.725,22.375 U9.4
  Bottom Layer w0.25: v1@46.95,22.55 R23.2
NetR24_1: R24.1 U8.1 | length 4.9
  Top Layer w0.25: U8.1 48.438,29.517 48.438,28.933 48.43,28.925 v1(48.425,28.925)
  Bottom Layer w0.25: v1(48.425,28.925) 48.425,25.2 R24.1
NetR24_2: R24.2 U9.6 | length 2.3
  Top Layer w0.2: v1(47.8,22.6) 48.025,22.375 U9.6
  Bottom Layer w0.2: v1(47.8,22.6) R24.2@48.45,23.25
NetU12_3: U12.3 U13.5 | length 3.1
  Bottom Layer w0.25: U12.3@36.035,18.185 U13.5
NRST: P5.10 R29.1 U5.1 U9.13 | length 13.2
  Top Layer w0.25: R29.1@41.95,16.95 43.375,16.95 43.75,17.325 43.75,19.025 43.475,19.3 U5.1 ; 43.425,19.35 43.425,24.325 45.425,26.325 U9.13
OSC_EN: U10.44 U12.1 | length 32.3
  Top Layer w0.25: v1(15.975,24.175) 22.2,24.175 v1(23.15,25.125)
  Bottom Layer w0.25: U10.44 16.026,26.95 16.35,26.626 16.35,25.025 15.975,24.65 v1(15.975,24.175) ; v1(23.15,25.125) 24.125,26.1 26.225,26.1 27.575,24.75 27.575,22.025 28,21.6 29.55,21.6 30.1,22.15 31.7,22.15 32.875,23.325 34.725,23.325 35.325,22.725 35.325,21.575 34.3,20.55 U12.1 U12.1@34.35,19.35
R\E\S\E\T\_OUTPUT: U3.2 U10.14 | length 11.6
  Top Layer w0.25: v1(26.005,31.425) 26.2,31.425 28.1,29.525 30.46,29.525 U3.2
  Bottom Layer w0.25: v1@25.98,31.425 25.98,29.67 27.2,28.45 U10.14
RS232.RXD: P3.2 U10.80 | length 6.1
  Bottom Layer w0.25: U10.80 26.95,36.75 27.525,37.325 29.225,37.325 30.865,37.325 P3.2
RS232.TXD: P3.3 U10.79 | length 10
  Bottom Layer w0.25: U10.79 26.025,35.7 26.25,35.475 26.625,35.475 28,36.85 32.15,36.85 33.7,38.4
SPI.MISO: U10.29 U13.3 | length 35.2
  Bottom Layer w0.25: U10.29@22.525,23.8 U10.29 22.525,21.05 22.075,20.6 22.075,17.575 22.7,16.95 31.25,16.95 33.35,14.85 35.25,14.85 37.05,13.05 37.05,11.4 37.5,10.95 40.69,10.95 41.027,11.287 41.027,11.36 ; U13.3@39.17,15.625 40.6,15.625 41.1,15.125 41.1,11.36
SPI.MOSI: U10.30 U13.4 | length 38.5
  Bottom Layer w0.25: U10.30 22.025,21.325 21.525,20.825 21.525,17.25 23,15.775 31.525,15.775 32.95,14.35 35.034,14.35 36.5,12.884 36.5,11.3 37.275,10.525 41.275,10.525 41.75,11 41.75,15.775 40.65,16.875 U13.4@39.19,16.875
SPI.SCLK: U10.27 U13.2 | length 22.2
  Bottom Layer w0.25: U10.27 23.525,20.15 24.825,18.85 31.225,18.85 31.9,18.175 31.9,17.075 33.625,15.35 35.6,15.35 36.575,14.375 U13.2
STANDBY: R3.2 U1.8 | length 3.6
  Top Layer w0.25: U1.8@22.47,34.855 U1.8 22.47,36.095 23.475,37.1 R3.2
TCK: P5.4 R26.1 U6.5 U9.3 | length 15.1
  Top Layer w0.25: R26.1@41.844,13.144 P5.4 ; P5.4@42.769,13.144 P5.4 ; P5.4@43.469,13.144 P5.4 ; v2(45.577,19.526) 45.816,19.526 46.075,19.785 U9.3 ; U6.5 47.45,18.8 47.3,18.65 47.3,15.425 46.913,15.038 45.213,15.038 43.975,13.8 43.975,13.475 43.644,13.144 P5.4
  Bottom Layer w0.25: v2(45.577,19.526) 46.278,18.825 v2(47.2,18.825)
TDI: P5.8 R27.2 U6.1 U9.1 | length 10.3
  Top Layer w0.2: U9.1 44.775,20.3 45.027,20.048 45.027,19.173 45.35,18.85 ; 45.325,18.875 45.725,18.875 46.15,19.3 46.2,19.3
  Top Layer w0.25: R27.2@41.719,15.681 P5.8 ; P5.8@43.531,15.681 P5.8 ; 45.35,18.85 45.35,18.375 44.4,17.425 44.4,16.3 43.781,15.681 P5.8 ; 46.2,19.3 U6.1
TDO: P5.6 R28.1 U4.6 U6.2 | length 16.5
  Top Layer w0.25: U4.6@40.14,20.84 U4.6 40.14,20.61 40.8,19.95 40.8,15.2 R28.1 ; R28.1@41.613,14.413 P5.6 ; P5.6@42.813,14.413 P5.6 ; P5.6@42.85,14.413 P5.6 ; U6.2 46.18,18.8 45.825,18.445 45.75,18.37 45.75,18.15 45.275,17.675 44.925,17.325 44.925,15.775 43.563,14.413 P5.6
TMS: P5.2 R25.1 U6.4 U9.5 | length 16.5
  Top Layer w0.2: U9.5 U9.5@47.388,21.26
  Top Layer w0.25: R25.1 42.625,11.4 P5.2 ; P5.2@43.17,11.875 P5.2 ; U9.5 47.375,20.55 48,19.925 48.35,19.925 48.725,19.55 48.725,18.675 48.35,18.3 U6.4 47.85,13.325 47.025,12.5 44.85,12.5 44.225,11.875 P5.2
WATCHDOG_LED: D1.2 U10.60 | length 6.6
  Top Layer w0.25: v1(16.65,32.225) 16.975,31.9 D1.2
  Bottom Layer w0.25: U10.60 16.2,34.95 16.65,34.5 16.65,32.575 16.475,32.4 v1(16.65,32.225)
pads on no net: P1. P2. P5.7 U1.5 U4.1 U4.4 U4.7 U5.2 U5.4 U5.5 U7.1 U9.8 U9.10 U10.6 U10.7 U10.11 U10.13 U10.15 U10.17 U10.18 U10.22 U10.23 U10.25 U10.26 U10.28 U10.31 U10.32 U10.35 U10.36 U10.45 U10.46 U10.47 U10.48 U10.49 U10.50 U10.51 U10.52 U10.53 U10.54 U10.55 U10.58 U10.59 U10.61 U10.62 U10.63 U10.64 U10.65 U10.68 U10.69 U10.70 U10.71 U10.72 U10.73 U10.74 U10.75 U10.76 U13. Y1.3 Y1.4

## Polygon pours and split planes (outlines as drawn)
GND on Top Layer "PSU1" (solid, remove dead copper, pour order 1000): 28.525,12.9 28.525,24.7 37.325,24.7 37.325,12.9
+5 on Top Layer "PSU1" (solid, pour order 1001): 11.8,15.025 14.321,15.025 14.321,11.5 14.35,11.45 14.192,11.175 11.814,11.175
+3.3 on Top Layer "PSU1" (solid, pour order 1002): 11.825,23.025 14.124,23.025 14.124,19.5 14.15,19.45 14.006,19.175 11.838,19.175
GND on Internal Plane 1 (split plane): 45.473,33.542 44.072,32.141 44.05,32.108 44.042,32.069 44.042,28.936 41.422,26.316 38.828,23.722 38.328,23.222 38.306,23.189 38.298,23.15 38.298,10.252 10.252,10.252 10.252,15.198 31.6,15.198 31.639,15.206 31.672,15.228 32.672,16.228 32.694,16.261 32.702,16.3 32.702,21.2 32.694,21.239 32.672,21.272 31.572,22.372 31.539,22.394 31.5,22.402 28.1,22.402 28.061,22.394 28.028,22.372 27.558,21.902 22.042,21.902 21.002,22.942 21.002,26.058 21.947,27.003 21.969,27.036 21.977,27.075 21.977,32.1 21.977,34.5 21.969,34.539 21.947,34.572 21.914,34.594 21.875,34.602 18.175,34.602 18.136,34.594 18.103,34.572 18.081,34.539 18.073,34.5 18.073,18.402 10.252,18.402 10.252,39.748 45.473,39.748
GND_ISOL on Internal Plane 1 (split plane): 49.748,10.252 38.502,10.252 38.502,23.108 38.972,23.578 41.566,26.172 44.216,28.822 44.238,28.855 44.246,28.894 44.246,32.027 45.647,33.428 45.669,33.461 45.677,33.5 45.677,39.748 49.748,39.748
GND on Internal Plane 1 (split plane): 21.773,32.1 21.773,27.117 20.828,26.172 20.806,26.139 20.798,26.1 20.798,22.9 20.806,22.861 20.821,22.839 20.828,22.828 21.928,21.728 21.961,21.706 22,21.698 27.6,21.698 27.639,21.706 27.672,21.728 28.142,22.198 31.458,22.198 32.498,21.158 32.498,16.342 31.558,15.402 10.252,15.402 10.252,18.198 18.175,18.198 18.214,18.206 18.247,18.228 18.269,18.261 18.277,18.3 18.277,34.398 21.773,34.398
+3.3 on Internal Plane 2 (split plane): 45.348,33.453 44.054,32.159 44.026,32.118 44.017,32.069 44.017,28.947 40.276,25.206 38.438,23.368 33.266,28.54 33.225,28.568 33.176,28.577 30.578,28.577 29.34,29.815 29.299,29.843 29.25,29.852 25.25,29.852 25.201,29.843 25.16,29.815 25.132,29.774 25.123,29.725 25.123,26.625 25.132,26.576 25.16,26.535 25.201,26.507 25.25,26.498 32.497,26.498 36.373,22.622 36.373,13.752 10.252,13.752 10.252,39.748 45.348,39.748
+3.3_ISOL on Internal Plane 2 (split plane): 49.748,10.252 38.527,10.252 38.527,21.3 38.527,23.097 40.456,25.026 44.234,28.804 44.262,28.845 44.272,28.894 44.272,32.016 45.565,33.31 45.593,33.351 45.602,33.4 45.602,39.748 49.748,39.748
+5 on Internal Plane 2 (split plane): 30.435,28.36 30.476,28.332 30.525,28.323 33.123,28.323 38.273,23.173 38.273,21.3 38.273,10.252 10.252,10.252 10.252,13.498 36.5,13.498 36.549,13.507 36.59,13.535 36.618,13.576 36.627,13.625 36.627,22.675 36.618,22.724 36.59,22.765 32.64,26.715 32.599,26.743 32.55,26.752 25.377,26.752 25.377,29.598 29.197,29.598
CAN_POWER on Internal Plane 2 (split plane): 21.748,33.525 21.748,30.878 20.685,29.815 20.657,29.774 20.648,29.725 20.657,29.676 20.673,29.653 20.673,27.742 19.628,26.697 19.606,26.664 19.598,26.625 19.598,25.225 19.606,25.186 19.628,25.153 20.673,24.108 20.673,21.347 20.657,21.324 20.648,21.275 20.657,21.226 20.685,21.185 20.726,21.157 20.775,21.148 26.148,21.148 26.148,16.652 21.528,16.652 18.265,19.915 17.402,20.778 17.402,35.122 18.228,35.948 21.748,35.948

## Keep-outs
Keep-Out Layer:
  lines w0.1: 10,10.025 50,10.025 50,40.025 10,40.025 10,10.025

## Other copper
Top Layer:
  rectangle net NetC5_1: 19.7,21.6 24.4,23.6
  rectangle net NetC6_1: 17.9,14.6 24.4,16.6
  rectangle net NetD2_1: 27.9,20.5 29.5,21.8
  rectangle net NetC5_1: 24.15,21.6 26.9,22.9
  rectangle net NetD3_1: 27.9,15.7 29.5,17.125
  rectangle net CAN_POWER: 26.3,18.425 29.35,19.225
  rectangle net GND: 21.35,17.025 23.35,21.125
  rectangle net +5: 10.55,10.55 16.775,13.375
  rectangle net +3.3: 10.55,20.75 16.775,23.625
  region net CAN_POWER: 24.2,21.225 24.2,16.925 25.425,16.925 26.9,18.4 26.9,19.35 25,21.225
  region net NetC5_1: 29.3,19.725 27.6,19.725 26.9,20.425 26.9,22.9 24.925,22.9 24.925,21.6 27.1,19.425 29.3,19.425
  region net NetC6_1: 29.325,18.225 27.025,18.225 25.4,16.6 23.975,16.6 23.975,15.6 24.3,15.275 26.9,15.275 26.9,17.25 27.575,17.925 29.325,17.925
Internal Plane 1 (plane layer: these items are gaps in the copper):
  lines w0.2: 10,15.3 21.5,15.3 31.6,15.3 32.6,16.3 32.6,21.2 31.5,22.3 28.1,22.3 27.6,21.8 22,21.8 20.9,22.9 20.9,26.1 21.875,27.075 21.875,32.1 21.875,34.5 18.175,34.5 18.175,18.3 10,18.3 ; 38.4,10.025 38.4,23.15 38.9,23.65 41.494,26.244 44.144,28.894 44.144,32.069 45.575,33.5 45.575,40.025
Internal Plane 2 (plane layer: these items are gaps in the copper):
  lines w0.2: 20.775,21.275 20.775,24.15 19.7,25.225 19.7,26.625 20.75,27.675 20.775,27.675 ; 20.775,27.625 20.775,29.725
  lines w0.25: 10,13.625 36.5,13.625 36.5,22.675 32.55,26.625 25.25,26.625 25.25,29.725 29.25,29.725 30.525,28.45 33.176,28.45 38.4,23.226 38.4,21.3 38.4,10.025 ; 20.775,21.275 26.275,21.275 26.275,16.525 21.475,16.525 18.175,19.825 17.275,20.725 17.275,35.175 18.175,36.075 21.875,36.075 21.875,33.525 21.875,30.825 20.775,29.725 ; 38.4,23.15 40.366,25.116 44.144,28.894 44.144,32.069 45.475,33.4 45.475,40

## Silkscreen, mask and mechanical layers (free items; w line width, h text height)
Top Overlay:
  drawing of 11 lines, arcs and shapes, not listed
  text "UART (TTL)" at 20.125,38.45 h1.5
  text "+36V" at 20.85,24.525 h1.5 r90
  text "CAN" at 19.475,24.275 h2 r90
  text "JTAG" at 45.125,10.9 h1.8 r90
  text "ISP EN" at 25.95,10.475 h1.8
Bottom Overlay:
  drawing of 5 lines, arcs and shapes, not listed
  text "DPW" at 13.65,38.4 h1.5
  text "JEB" at 13.141,37.15 h1.5
  text "VERSION 1.0.0" at 31.91,14.299 h1.5
  text "PRESSURE SENSOR" at 24.55,11.275 h1.5

## Text inside footprints (layer, text, board x,y; h text height)
P5: Top Overlay "1" at 46.5,10.825 h0.8 r90; Top Overlay "2" at 43.575,10.5 h0.8 r90